# Altium PCB PCB1.PcbDoc
Units mm, origin at the board's own origin, x right, y up, seen from the top; angles counter-clockwise.
Board outline 152.4 x 101.6 mm, 2 copper layers (Top Layer, Bottom Layer); 7 components, 6 nets, 28 pads, 0 vias.
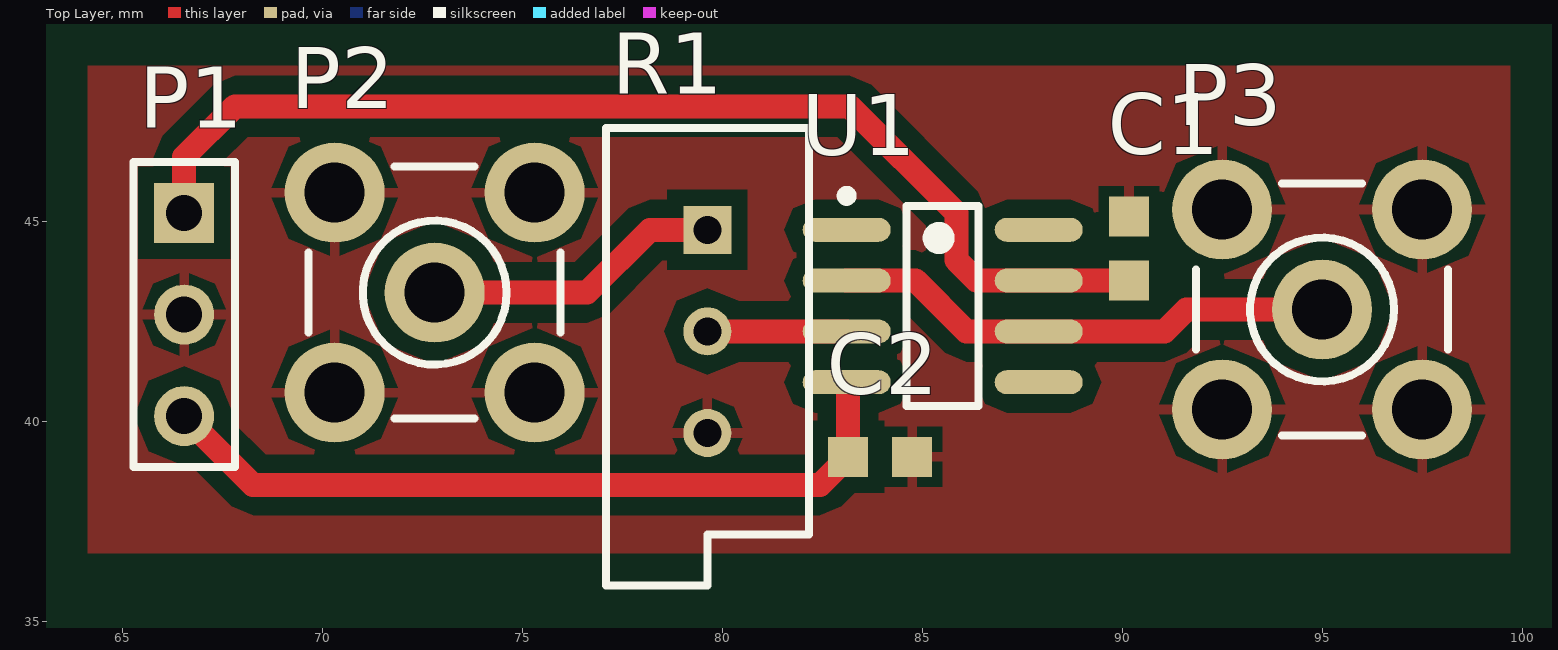
[diagram p0: Top Layer view]
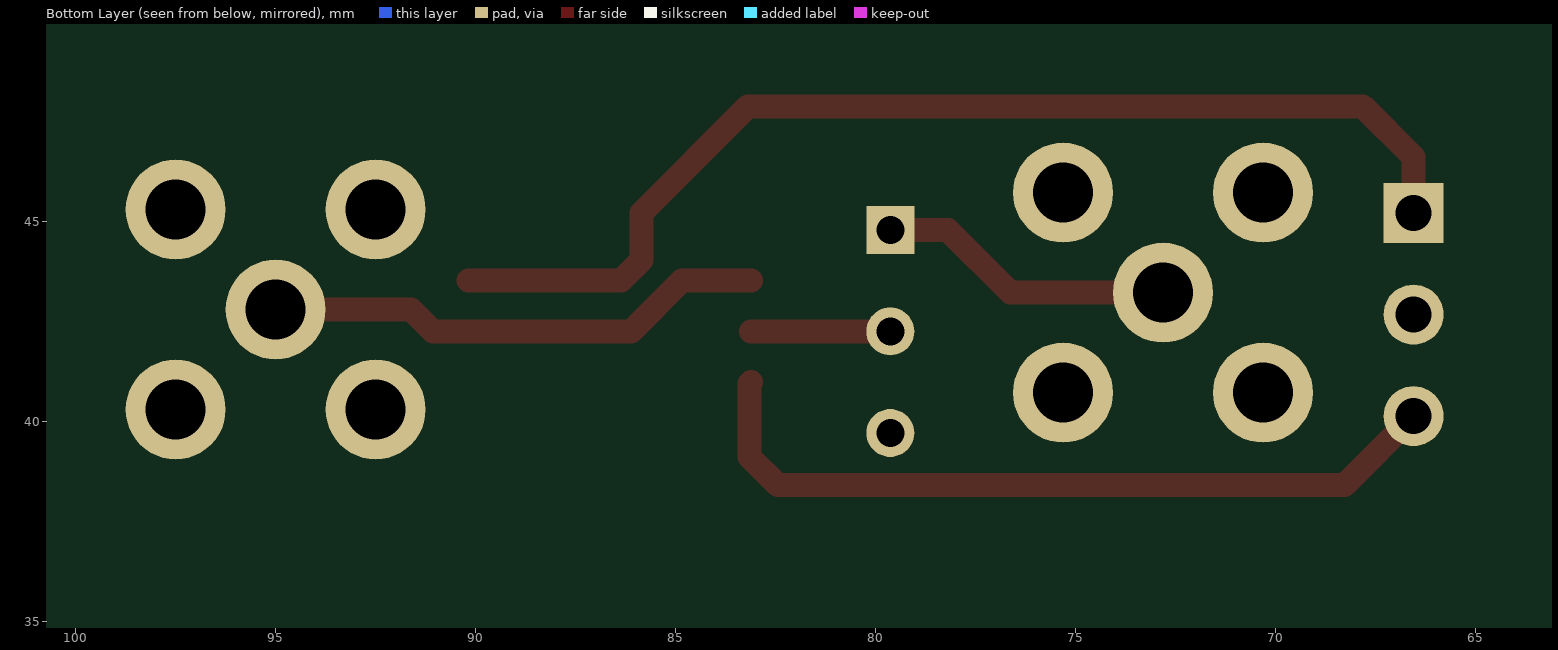
[diagram p1: Bottom Layer view, seen from below]

## Layer stack, top to bottom
Top Solder: solder mask 0.0102, Solder Resist, Dk 3.5
Top Layer: signal copper 0.0356
Dielectric 1: dielectric 0.32, FR-4, Dk 4.8
Bottom Layer: signal copper 0.0356
Bottom Solder: solder mask 0.0102, Solder Resist, Dk 3.5

## Board outline
25.4,25.4 177.8,25.4 177.8,127 25.4,127

## Design rules (kind name [scope] priority, off if disabled: settings)
Clearance [All] p1: gap=0.4 ignorepadtopadclearanceinfootprint=FALSE
PolygonConnect [All] p1: connectstyle=Relief reliefconductorwidth=0.254 reliefentries=4 polygonreliefangle="90 Angle" airgapwidth=0.254
RoutingVias [All] p1: holewidth=0.711 width=1.27 viastyle="Through Hole" minholewidth=0.711 minwidth=1.27 maxholewidth=0.711 maxwidth=1.27
SolderMaskExpansion [All] p1: expansion=0.102
Width [All] p1: maxlimit=0.9 minlimit=0.45 preferedwidth=0.6
30 further rules are at their usual default settings.

## Components (designator, comment, footprint, x,y, rotation, side; value= is the part's Value field where it differs from the comment)
C1 "Cap" CAPC1608N 90.17,44.323 r90 top value=100pF
C2 "Cap" CAPC1608N 83.947,39.116 r0 top value=100pF
P1 "Header 3" HDR1X3 66.548,45.212 r270 top
P2 "SMB" SMB_V-RJ45 72.811,43.22 r0 top
P3 "SMB" SMB_V-RJ45 94.996,42.799 r0 top
R1 "Res Tap" VR5 79.629,42.251 r270 top value=1K
U1 "OPA820ID" TI-D8_N 85.511,42.886 r0 top

## Footprints (in the part's own frame and the unit in brackets; to place one, negate y for a bottom-side part, rotate by r counter-clockwise, add the part's x,y. Pads: shape width x height; smd on the part's side, far side on the other; paste and mask are expansions set on the pad)
CAPC1608N [mm] "Chip Capacitor, Body 1.6x0.8mm, IPC Medium Density"
  rect 1x1 smd: 1(-0.8,0) 2(0.8,0)
  body extent -0.87,-0.48 0.87,0.48, height 0.85
HDR1X3 [mm] "Connector; Header; 3 Position"
  rect 1.5x1.5 hole 0.9: 1(0,0)
  round 1.5 hole 0.9: 2(2.54,0) 3(5.08,0)
  silkscreen extent -1.27,-1.27 6.35,1.27
SMB_V-RJ45 [mm] "Connector; SMB Straight"
  round 2.5 hole 1.5: 1(0,0) 2(-2.5,-2.5) 2(-2.5,2.5) 2(2.5,-2.5) 2(2.5,2.5)
  silkscreen extent -3.15,-3.15 3.15,3.15
TI-D8_N [mm] "SOIC, 8-Leads, Body 4.9x3.9mm, Pitch 1.27mm, IPC Medium Density"
  oval 2.2x0.6 smd: 1(-2.4,1.905) 2(-2.4,0.635) 3(-2.4,-0.635) 4(-2.4,-1.905) 5(2.4,-1.905) 6(2.4,-0.635) 7(2.4,0.635) 8(2.4,1.905)
  silkscreen extent -2.52,-2.5 0.9,2.88, body extent -2,-2.5 2,2.5, height 1.75
VR5 [mm] "Thru-Hole; 3 Leads"
  rect 1.2x1.2 hole 0.7: 1(-2.54,0)
  round 1.2 hole 0.7: 2(0,0) 3(2.54,0)
  silkscreen extent -5.08,-2.54 6.35,2.54

## Part data
C1 C2: "Capacitor", LatestRevisionDate=17-Jul-2002, LatestRevisionNote="Re-released for DXP Platform.", PackageDescription="Radial Cap, Thru-Hole; 2 Leads; 0.3 in Pin Spacing", PackageReference=RAD-0.3, Published=8-Jun-2000, Publisher="Altium Limited"
P1: "Header, 3-Pin", LatestRevisionDate=17-Jul-2002, LatestRevisionNote="Re-released for DXP Platform.", Publisher="Altium Limited"
P2 P3: "SMB Straight Connector", LatestRevisionDate=17-Jul-2002, LatestRevisionNote="Re-released for DXP Platform.", Publisher="Altium Limited"
R1: "Tapped Resistor", LatestRevisionDate=17-Jul-2002, LatestRevisionNote="Re-released for DXP Platform.", PackageDescription="Variable Resistor, Thru-Hole; 3 Leads", PackageReference=VR3, Published=24-Mar-1999, Publisher="Altium Limited", Set Position=0.5, Sim Note="Enter the Resistance value and the set point into parameter fields."
U1: "Unity Gain Stable, Low Noise, Voltage Feedback Operational Amplifier, 5 to 12 V, -40 to 85 degC, 8-pin SOIC (D8), Green (RoHS & no Sb/Br)", Manufacturer="Texas Instruments", Supplier Part Number 1=296-17130-5-ND, 2nd Harmonic(dBc)=90, 3rd Harmonic(dBc)=110, @ MHz=1, Acl, min stable gain(V/V)=1, BW @ Acl(MHz)=700, Code_JEDEC=MS-012, ComponentLink1Description="Manufacturer URL", ComponentLink1URL=http://www.ti.com/, ComponentLink2Description=Datasheet, ComponentLink2URL=http://www.ti.com/general/docs/lit/getliterature.tsp?genericPartNumber=OPA820&fileType=pdf, ComponentLink3Description="Package Specification", ComponentLink3URL=http://www.ti.com/litv/pdf/msoi002j, DatasheetVersion=SBOS303C, Diff Gain(%)=0.01, Diff Phase(deg)=0.03, Eco-Plan="Green (RoHS & no Sb/Br)", Iib(Max)(nA)=2300, Io(Typ)(mA)=110, Iq per channel(Max)(mA)=6.4, Mounting Technology="Surface Mount", Number of Channels=1, PackageDescription="8-Pin Plastic Small Outline, Body 4.9 x 3.9 mm, Pitch 1.27 mm", PackageReference=D8, PackageVersion="4040047-3/M, 06/2011", PartNumber=OPA820ID, Settling Time (0.1%)(Typ)(ns)=26, Slew Rate(Typ)(V/us)=240, Sub Family="High Output Current Amplifier (>=50mA), High Speed Amplifier (>=50MHz)", Supplier 1=Digi-Key, Supplier 2=Farnell, Supplier 3=Newark, Supplier 4=Mouser, Supplier Part Number 2=1560648, Supplier Part Number 3=21J8856, Supplier Part Number 4=595-OPA820ID, THD (Fc is 1 MHz)(Typ)(dB)=-85, Vio(Max)(mV)=1, Vn at Flatband(Typ)(nV/rtHz)=2.5, Vs(Max)(V)=12, Vs(Min)(V)=5

## Nets (pads, with @x,y where several pads share a name; then routed paths per layer and width w, separated by ;. In a path a pad name is that pad's centre, name@x,y a point inside that pad or via, vN(x,y) a via of type N, cw(c..) or ccw(c..) an arc to the next point about the centre after c; other vN are vias at no path point)
5N0: C2.1 P1.3 U1.4 | length 19.5
  Top Layer w0.6: P1.3 68.269,38.411 82.442,38.411 C2.1 83.147,40.945 U1.4
5P0: C1.1 P1.1 U1.7 | length 28
  Top Layer w0.6: P1.1 66.548,46.609 67.818,47.879 83.185,47.879 85.852,45.212 85.852,44.031 86.362,43.521 U1.7 90.168,43.521 C1.1
GND: C1.2 C2.2 P1.2 P2.2 P3.2 R1.3
NetP2_1: P2.1 R1.1 | length 7.5
  Top Layer w0.6: P2.1 76.621,43.22 78.192,44.791 R1.1
NetP3_1: P3.1 U1.2 U1.6 | length 12.6
  Top Layer w0.6: U1.2 84.836,43.521 86.106,42.251 U1.6 91.059,42.251 91.607,42.799 P3.1
NetR1_3: R1.2 U1.3 | length 3.5
  Top Layer w0.6: R1.2 U1.3
pads on no net: U1.1 U1.5 U1.8

## Polygon pours and split planes (outlines as drawn)
GND on Top Layer "GND" (solid, remove dead copper, pour order 0): 64.135,48.895 64.135,36.703 99.695,36.703 99.695,48.895